# Altium PCB PCB1.PcbDoc (part 1 of 2)
Units mm, origin at the board's own origin, x right, y up, seen from the top; angles counter-clockwise.
Board outline 150 x 80 mm, 2 copper layers (Top Layer, Bottom Layer), stack 1.571 mm thick; 176 components, 104 nets, 518 pads, 47 vias.
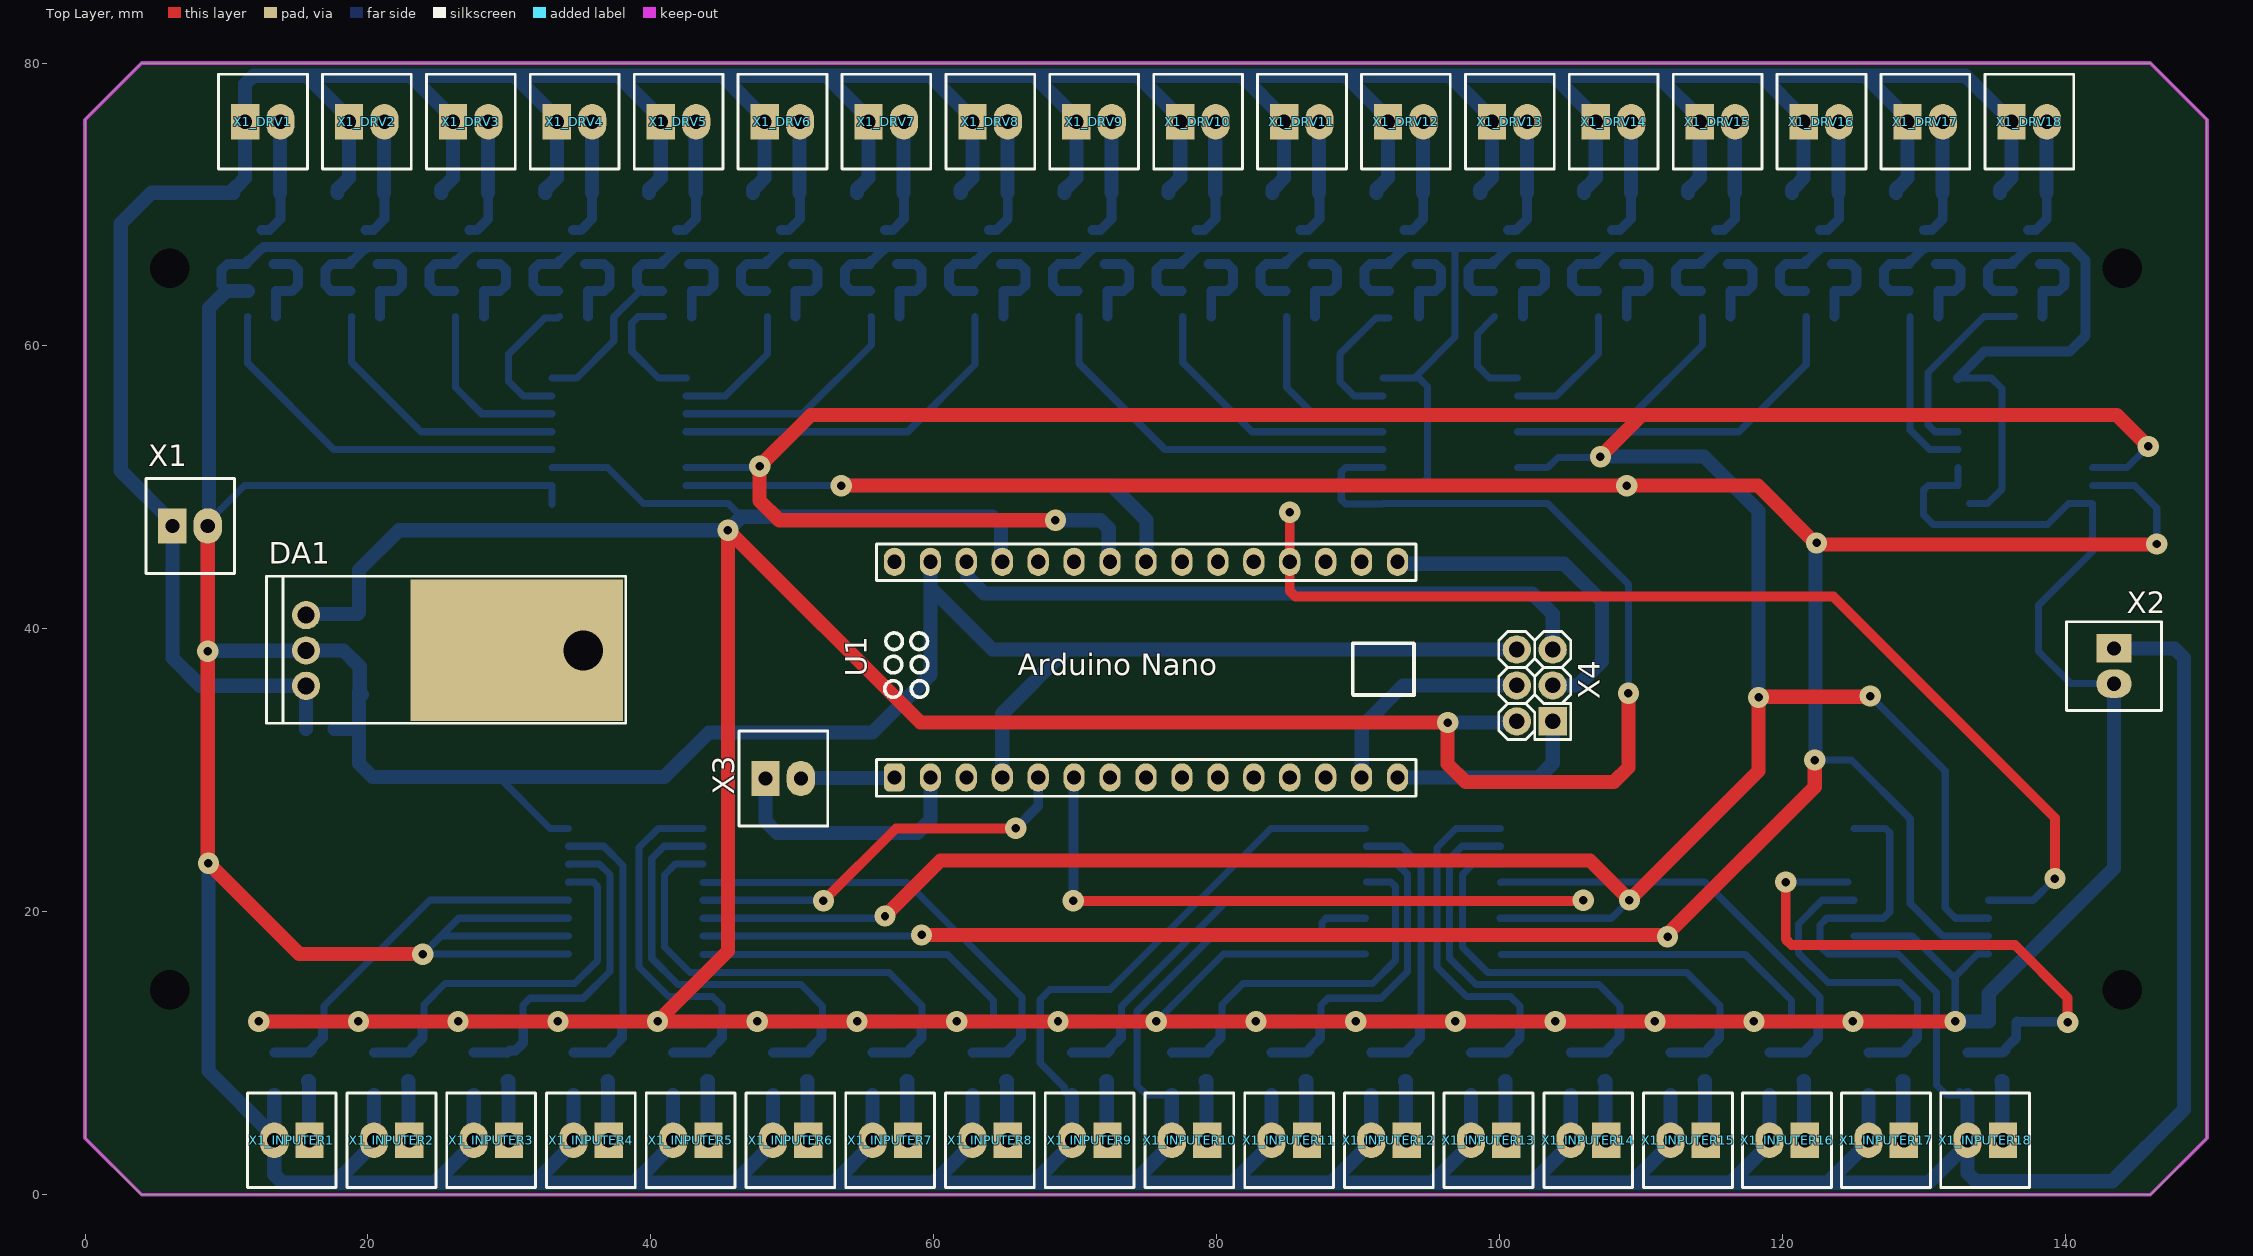
[diagram p0: Top Layer view]
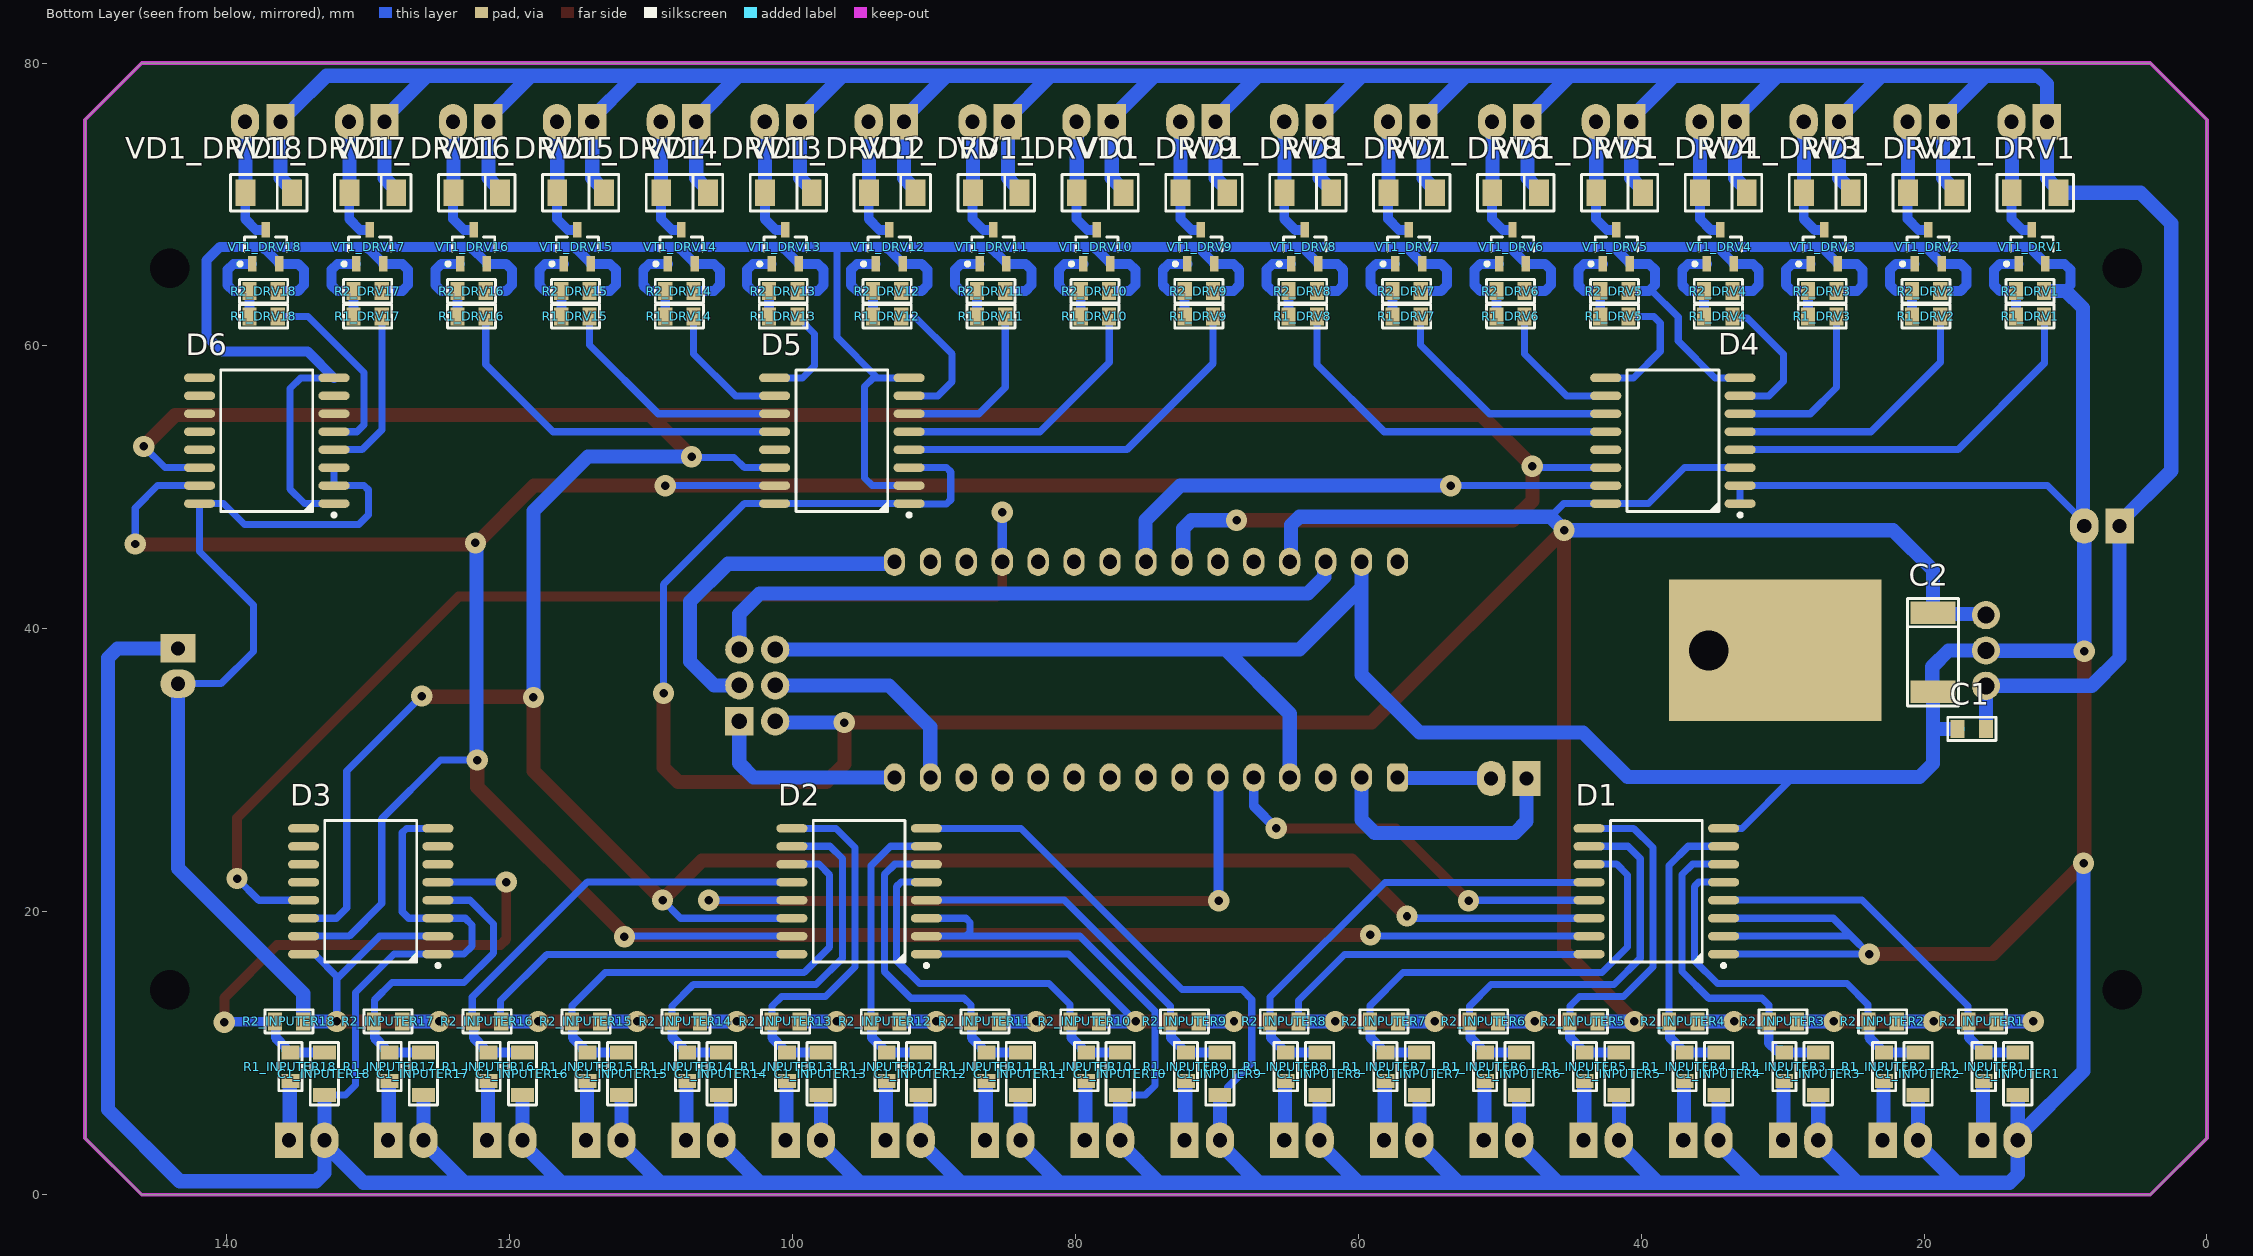
[diagram p1: Bottom Layer view, seen from below]

## Layer stack, top to bottom
Top Solder: solder mask 0.0102, Solder Resist, Dk 3.5
Top Layer: signal copper 0.0356
Dielectric 1: dielectric 1.5, FR-4, Dk 4.8
Bottom Layer: signal copper 0.0356
Bottom Solder: solder mask 0.0102, Solder Resist, Dk 3.5

## Board outline
4,0 0,4 0,76 4,80 146,80 150,76 150,4 146,0

## Design rules (kind name [scope] priority, off if disabled: settings)
Clearance [All] p1: gap=0.254 ignorepadtopadclearanceinfootprint=FALSE except(0: Arc-Hole Track-Hole SMDPad-Hole THPad-Hole Via-Hole Fill-Hole Poly-Hole Region-Hole Text-Hole)
PlaneConnect [All] p1: planeconnectstyle=Relief reliefexpansion=0.508 reliefentries=4 reliefconductorwidth=0.7 reliefairgap=0.254
PolygonConnect [All] p1: connectstyle=Relief reliefconductorwidth=0.7 reliefentries=4 polygonreliefangle="90 Angle" airgapwidth=0.254
RoomDefinition DRV9 [InComponentClass('DRV9')] p1: confinementstyle=ConfineIn formatcopy=TRUE lockcomponents=FALSE outline 74.876,60.85 74.876,79.8 67.626,79.8 67.626,60.85
RoomDefinition DRV1 [InComponentClass('DRV1')] p2: confinementstyle=ConfineIn formatcopy=TRUE lockcomponents=FALSE outline 16.12,60.85 16.12,79.8 8.87,79.8 8.87,60.85
RoomDefinition DRV4 [InComponentClass('DRV4')] p3: confinementstyle=ConfineIn formatcopy=TRUE lockcomponents=FALSE outline 38.154,60.85 38.154,79.8 30.904,79.8 30.904,60.85
RoomDefinition DRV3 [InComponentClass('DRV3')] p4: confinementstyle=ConfineIn formatcopy=TRUE lockcomponents=FALSE outline 30.809,60.85 30.809,79.8 23.559,79.8 23.559,60.85
RoomDefinition DRV2 [InComponentClass('DRV2')] p5: confinementstyle=ConfineIn formatcopy=TRUE lockcomponents=FALSE outline 23.465,60.85 23.465,79.8 16.215,79.8 16.215,60.85
RoomDefinition DRV8 [InComponentClass('DRV8')] p6: confinementstyle=ConfineIn formatcopy=TRUE lockcomponents=FALSE outline 67.531,60.85 67.531,79.8 60.281,79.8 60.281,60.85
RoomDefinition DRV7 [InComponentClass('DRV7')] p7: confinementstyle=ConfineIn formatcopy=TRUE lockcomponents=FALSE outline 60.187,60.85 60.187,79.8 52.937,79.8 52.937,60.85
RoomDefinition DRV6 [InComponentClass('DRV6')] p8: confinementstyle=ConfineIn formatcopy=TRUE lockcomponents=FALSE outline 52.842,60.85 52.842,79.8 45.592,79.8 45.592,60.85
RoomDefinition DRV12 [InComponentClass('DRV12')] p9: confinementstyle=ConfineIn formatcopy=TRUE lockcomponents=FALSE outline 96.909,60.85 96.909,79.8 89.659,79.8 89.659,60.85
RoomDefinition DRV11 [InComponentClass('DRV11')] p10: confinementstyle=ConfineIn formatcopy=TRUE lockcomponents=FALSE outline 89.564,60.85 89.564,79.8 82.314,79.8 82.314,60.85
RoomDefinition DRV10 [InComponentClass('DRV10')] p11: confinementstyle=ConfineIn formatcopy=TRUE lockcomponents=FALSE outline 82.22,60.85 82.22,79.8 74.97,79.8 74.97,60.85
RoomDefinition DRV17 [InComponentClass('DRV17')] p12: confinementstyle=ConfineIn formatcopy=TRUE lockcomponents=FALSE outline 133.631,60.85 133.631,79.8 126.381,79.8 126.381,60.85
RoomDefinition DRV16 [InComponentClass('DRV16')] p13: confinementstyle=ConfineIn formatcopy=TRUE lockcomponents=FALSE outline 126.286,60.85 126.286,79.8 119.036,79.8 119.036,60.85
RoomDefinition DRV15 [InComponentClass('DRV15')] p14: confinementstyle=ConfineIn formatcopy=TRUE lockcomponents=FALSE outline 118.942,60.85 118.942,79.8 111.692,79.8 111.692,60.85
RoomDefinition DRV14 [InComponentClass('DRV14')] p15: confinementstyle=ConfineIn formatcopy=TRUE lockcomponents=FALSE outline 111.598,60.85 111.598,79.8 104.348,79.8 104.348,60.85
RoomDefinition DRV13 [InComponentClass('DRV13')] p16: confinementstyle=ConfineIn formatcopy=TRUE lockcomponents=FALSE outline 104.253,60.85 104.253,79.8 97.003,79.8 97.003,60.85
RoomDefinition DRV5 [InComponentClass('DRV5')] p17: confinementstyle=ConfineIn formatcopy=TRUE lockcomponents=FALSE outline 45.498,60.85 45.498,79.8 38.248,79.8 38.248,60.85
RoomDefinition DRV18 [InComponentClass('DRV18')] p18: confinementstyle=ConfineIn formatcopy=TRUE lockcomponents=FALSE outline 140.984,60.85 140.984,79.8 133.734,79.8 133.734,60.85
RoomDefinition INPUTER1 [InComponentClass('INPUTER1')] p19: confinementstyle=ConfineIn formatcopy=TRUE lockcomponents=FALSE outline 11.175,-0.15 18.075,-0.15 18.075,13.35 11.175,13.35
RoomDefinition INPUTER16 [InComponentClass('INPUTER16')] p20: confinementstyle=ConfineIn formatcopy=TRUE lockcomponents=FALSE outline 116.875,-0.15 123.775,-0.15 123.775,13.35 116.875,13.35
RoomDefinition INPUTER18 [InComponentClass('INPUTER18')] p21: confinementstyle=ConfineIn formatcopy=TRUE lockcomponents=FALSE outline 130.875,-0.15 137.775,-0.15 137.775,13.35 130.875,13.35
RoomDefinition INPUTER17 [InComponentClass('INPUTER17')] p22: confinementstyle=ConfineIn formatcopy=TRUE lockcomponents=FALSE outline 123.875,-0.15 130.775,-0.15 130.775,13.35 123.875,13.35
RoomDefinition INPUTER2 [InComponentClass('INPUTER2')] p23: confinementstyle=ConfineIn formatcopy=TRUE lockcomponents=FALSE outline 18.225,-0.15 25.125,-0.15 25.125,13.35 18.225,13.35
RoomDefinition INPUTER15 [InComponentClass('INPUTER15')] p24: confinementstyle=ConfineIn formatcopy=TRUE lockcomponents=FALSE outline 109.875,-0.15 116.775,-0.15 116.775,13.35 109.875,13.35
RoomDefinition INPUTER14 [InComponentClass('INPUTER14')] p25: confinementstyle=ConfineIn formatcopy=TRUE lockcomponents=FALSE outline 102.825,-0.15 109.725,-0.15 109.725,13.35 102.825,13.35
RoomDefinition INPUTER13 [InComponentClass('INPUTER13')] p26: confinementstyle=ConfineIn formatcopy=TRUE lockcomponents=FALSE outline 95.775,-0.15 102.675,-0.15 102.675,13.35 95.775,13.35
RoomDefinition INPUTER12 [InComponentClass('INPUTER12')] p27: confinementstyle=ConfineIn formatcopy=TRUE lockcomponents=FALSE outline 88.725,-0.15 95.625,-0.15 95.625,13.35 88.725,13.35
RoomDefinition INPUTER11 [InComponentClass('INPUTER11')] p28: confinementstyle=ConfineIn formatcopy=TRUE lockcomponents=FALSE outline 81.675,-0.15 88.575,-0.15 88.575,13.35 81.675,13.35
RoomDefinition INPUTER10 [InComponentClass('INPUTER10')] p29: confinementstyle=ConfineIn formatcopy=TRUE lockcomponents=FALSE outline 74.625,-0.15 81.525,-0.15 81.525,13.35 74.625,13.35
RoomDefinition INPUTER9 [InComponentClass('INPUTER9')] p30: confinementstyle=ConfineIn formatcopy=TRUE lockcomponents=FALSE outline 67.575,-0.15 74.475,-0.15 74.475,13.35 67.575,13.35
RoomDefinition INPUTER8 [InComponentClass('INPUTER8')] p31: confinementstyle=ConfineIn formatcopy=TRUE lockcomponents=FALSE outline 60.525,-0.15 67.425,-0.15 67.425,13.35 60.525,13.35
RoomDefinition INPUTER7 [InComponentClass('INPUTER7')] p32: confinementstyle=ConfineIn formatcopy=TRUE lockcomponents=FALSE outline 53.475,-0.15 60.375,-0.15 60.375,13.35 53.475,13.35
RoomDefinition INPUTER6 [InComponentClass('INPUTER6')] p33: confinementstyle=ConfineIn formatcopy=TRUE lockcomponents=FALSE outline 46.425,-0.15 53.325,-0.15 53.325,13.35 46.425,13.35
RoomDefinition INPUTER5 [InComponentClass('INPUTER5')] p34: confinementstyle=ConfineIn formatcopy=TRUE lockcomponents=FALSE outline 39.375,-0.15 46.275,-0.15 46.275,13.35 39.375,13.35
RoomDefinition INPUTER4 [InComponentClass('INPUTER4')] p35: confinementstyle=ConfineIn formatcopy=TRUE lockcomponents=FALSE outline 32.325,-0.15 39.225,-0.15 39.225,13.35 32.325,13.35
RoomDefinition INPUTER3 [InComponentClass('INPUTER3')] p36: confinementstyle=ConfineIn formatcopy=TRUE lockcomponents=FALSE outline 25.275,-0.15 32.175,-0.15 32.175,13.35 25.275,13.35
RoomDefinition DA1 [InComponentClass('DA1')] p37: confinementstyle=ConfineIn formatcopy=TRUE lockcomponents=FALSE outline 11.525,31.775 39.8,31.775 39.8,45.875 11.525,45.875
RoutingVias [All] p1: holewidth=0.711 width=1.27 viastyle="Through Hole" minholewidth=0.711 minwidth=1.27 maxholewidth=0.711 maxwidth=1.27
SolderMaskExpansion [All] p1: expansion=0.102 istentingtop=FALSE
Width [All] p1: maxlimit=1 minlimit=0.3 preferedwidth=0.5 minimp=50.000000 maximp=50.000000 favimp=50.000000
29 further rules are at their usual default settings.

## Classes and differential pairs
component class INPUTER18: C1_INPUTER18 R1_INPUTER18 R2_INPUTER18 X1_INPUTER18
component class INPUTER17: C1_INPUTER17 R1_INPUTER17 R2_INPUTER17 X1_INPUTER17
component class INPUTER16: C1_INPUTER16 R1_INPUTER16 R2_INPUTER16 X1_INPUTER16
component class DRV18: R1_DRV18 R2_DRV18 VD1_DRV18 VT1_DRV18 X1_DRV18
component class DRV17: R1_DRV17 R2_DRV17 VD1_DRV17 VT1_DRV17 X1_DRV17
channel class input: INPUTER1 INPUTER2 INPUTER3 INPUTER4 INPUTER5 INPUTER6 INPUTER7 INPUTER8 INPUTER9 INPUTER10 INPUTER11 INPUTER12 INPUTER13 INPUTER14 INPUTER15 INPUTER16 INPUTER17 INPUTER18
net class OUT[1..18]: OUT1 OUT2 OUT3 OUT4 OUT5 OUT6 OUT7 OUT8 OUT9 OUT10 OUT11 OUT12 OUT13 OUT14 OUT15 OUT16 OUT17 OUT18
component class INPUTER15: C1_INPUTER15 R1_INPUTER15 R2_INPUTER15 X1_INPUTER15
component class INPUTER14: C1_INPUTER14 R1_INPUTER14 R2_INPUTER14 X1_INPUTER14
component class INPUTER13: C1_INPUTER13 R1_INPUTER13 R2_INPUTER13 X1_INPUTER13
component class INPUTER12: C1_INPUTER12 R1_INPUTER12 R2_INPUTER12 X1_INPUTER12
component class INPUTER11: C1_INPUTER11 R1_INPUTER11 R2_INPUTER11 X1_INPUTER11
component class INPUTER10: C1_INPUTER10 R1_INPUTER10 R2_INPUTER10 X1_INPUTER10
component class INPUTER9: C1_INPUTER9 R1_INPUTER9 R2_INPUTER9 X1_INPUTER9
component class INPUTER8: C1_INPUTER8 R1_INPUTER8 R2_INPUTER8 X1_INPUTER8
component class INPUTER7: C1_INPUTER7 R1_INPUTER7 R2_INPUTER7 X1_INPUTER7
component class INPUTER6: C1_INPUTER6 R1_INPUTER6 R2_INPUTER6 X1_INPUTER6
component class INPUTER5: C1_INPUTER5 R1_INPUTER5 R2_INPUTER5 X1_INPUTER5
component class INPUTER4: C1_INPUTER4 R1_INPUTER4 R2_INPUTER4 X1_INPUTER4
component class INPUTER3: C1_INPUTER3 R1_INPUTER3 R2_INPUTER3 X1_INPUTER3
component class INPUTER2: C1_INPUTER2 R1_INPUTER2 R2_INPUTER2 X1_INPUTER2
component class INPUTER1: C1_INPUTER1 R1_INPUTER1 R2_INPUTER1 X1_INPUTER1
component class DRV16: R1_DRV16 R2_DRV16 VD1_DRV16 VT1_DRV16 X1_DRV16
component class DRV15: R1_DRV15 R2_DRV15 VD1_DRV15 VT1_DRV15 X1_DRV15
component class DRV14: R1_DRV14 R2_DRV14 VD1_DRV14 VT1_DRV14 X1_DRV14
component class DRV13: R1_DRV13 R2_DRV13 VD1_DRV13 VT1_DRV13 X1_DRV13
component class DA1: C1 C2 DA1
channel class driver: DRV1 DRV2 DRV3 DRV4 DRV5 DRV6 DRV7 DRV8 DRV9 DRV10 DRV11 DRV12 DRV13 DRV14 DRV15 DRV16 DRV17 DRV18
net class IN[1..18]: IN1 IN2 IN3 IN4 IN5 IN6 IN7 IN8 IN9 IN10 IN11 IN12 IN13 IN14 IN15 IN16 IN17 IN18
component class Sheet1: D1 D2 D3 D4 D5 D6 U1 X1 X2 X3 X4
component class DRV12: R1_DRV12 R2_DRV12 VD1_DRV12 VT1_DRV12 X1_DRV12
component class DRV11: R1_DRV11 R2_DRV11 VD1_DRV11 VT1_DRV11 X1_DRV11
component class DRV10: R1_DRV10 R2_DRV10 VD1_DRV10 VT1_DRV10 X1_DRV10
component class DRV9: R1_DRV9 R2_DRV9 VD1_DRV9 VT1_DRV9 X1_DRV9
component class DRV8: R1_DRV8 R2_DRV8 VD1_DRV8 VT1_DRV8 X1_DRV8
component class DRV7: R1_DRV7 R2_DRV7 VD1_DRV7 VT1_DRV7 X1_DRV7
component class DRV6: R1_DRV6 R2_DRV6 VD1_DRV6 VT1_DRV6 X1_DRV6
component class DRV5: R1_DRV5 R2_DRV5 VD1_DRV5 VT1_DRV5 X1_DRV5
component class DRV4: R1_DRV4 R2_DRV4 VD1_DRV4 VT1_DRV4 X1_DRV4
component class DRV3: R1_DRV3 R2_DRV3 VD1_DRV3 VT1_DRV3 X1_DRV3
component class DRV2: R1_DRV2 R2_DRV2 VD1_DRV2 VT1_DRV2 X1_DRV2
component class DRV1: R1_DRV1 R2_DRV1 VD1_DRV1 VT1_DRV1 X1_DRV1

## Components (designator, comment, footprint, x,y, rotation, side; value= is the part's Value field where it differs from the comment)
C1 "0,1 мкФ, 50 В, 10 %" "CAP: 0805" 16.625,32.925 r180 bottom
C1_INPUTER1 "22 мкФ, 16В, 10%" "CAP: 1206" 13.375,8.55 r90 bottom (schematic designator C1)
C1_INPUTER2 "22 мкФ, 16В, 10%" "CAP: 1206" 20.425,8.55 r90 bottom (schematic designator C1)
C1_INPUTER3 "22 мкФ, 16В, 10%" "CAP: 1206" 27.475,8.55 r90 bottom (schematic designator C1)
C1_INPUTER4 "22 мкФ, 16В, 10%" "CAP: 1206" 34.525,8.55 r90 bottom (schematic designator C1)
C1_INPUTER5 "22 мкФ, 16В, 10%" "CAP: 1206" 41.575,8.55 r90 bottom (schematic designator C1)
C1_INPUTER6 "22 мкФ, 16В, 10%" "CAP: 1206" 48.625,8.55 r90 bottom (schematic designator C1)
C1_INPUTER7 "22 мкФ, 16В, 10%" "CAP: 1206" 55.675,8.55 r90 bottom (schematic designator C1)
C1_INPUTER8 "22 мкФ, 16В, 10%" "CAP: 1206" 62.725,8.55 r90 bottom (schematic designator C1)
C1_INPUTER9 "22 мкФ, 16В, 10%" "CAP: 1206" 69.775,8.55 r90 bottom (schematic designator C1)
C1_INPUTER10 "22 мкФ, 16В, 10%" "CAP: 1206" 76.825,8.55 r90 bottom (schematic designator C1)
C1_INPUTER11 "22 мкФ, 16В, 10%" "CAP: 1206" 83.875,8.55 r90 bottom (schematic designator C1)
C1_INPUTER12 "22 мкФ, 16В, 10%" "CAP: 1206" 90.925,8.55 r90 bottom (schematic designator C1)
C1_INPUTER13 "22 мкФ, 16В, 10%" "CAP: 1206" 97.975,8.55 r90 bottom (schematic designator C1)
C1_INPUTER14 "22 мкФ, 16В, 10%" "CAP: 1206" 105.025,8.55 r90 bottom (schematic designator C1)
C1_INPUTER15 "22 мкФ, 16В, 10%" "CAP: 1206" 112.075,8.55 r90 bottom (schematic designator C1)
C1_INPUTER16 "22 мкФ, 16В, 10%" "CAP: 1206" 119.075,8.55 r90 bottom (schematic designator C1)
C1_INPUTER17 "22 мкФ, 16В, 10%" "CAP: 1206" 126.075,8.55 r90 bottom (schematic designator C1)
C1_INPUTER18 "22 мкФ, 16В, 10%" "CAP: 1206" 133.075,8.55 r90 bottom (schematic designator C1)
C2 "22 мкФ, 10%, 16 В" "CAP: TANTAL-C" 19.375,38.35 r270 bottom
D1 "IC logic buffer, 2...6V, -40...+125°C, 20-TSSOP" 16-TSSOP 38.925,21.45 r0 bottom
D2 "IC logic buffer, 2...6V, -40...+125°C, 20-TSSOP" 16-TSSOP 95.275,21.45 r0 bottom
D3 "IC logic buffer, 2...6V, -40...+125°C, 20-TSSOP" 16-TSSOP 129.8,21.45 r0 bottom
D4 "IC logic buffer, 2...6V, -40...+125°C, 20-TSSOP" 16-TSSOP 37.75,53.3 r0 bottom
D5 "IC logic buffer, 2...6V, -40...+125°C, 20-TSSOP" 16-TSSOP 96.5,53.3 r0 bottom
D6 "IC logic buffer, 2...6V, -40...+125°C, 20-TSSOP" 16-TSSOP 137.15,53.3 r0 bottom
DA1 "L4940V5" TO220_L 15.625,38.475 r90 top
R1_DRV1 "100 Ом, 5%, 0,125 Вт" "RES: 0805" 12.51,62.084 r0 bottom value=100 (schematic designator R1)
R1_DRV2 "100 Ом, 5%, 0,125 Вт" "RES: 0805" 19.854,62.084 r0 bottom value=100 (schematic designator R1)
R1_DRV3 "100 Ом, 5%, 0,125 Вт" "RES: 0805" 27.199,62.084 r0 bottom value=100 (schematic designator R1)
R1_DRV4 "100 Ом, 5%, 0,125 Вт" "RES: 0805" 34.543,62.084 r0 bottom value=100 (schematic designator R1)
R1_DRV5 "100 Ом, 5%, 0,125 Вт" "RES: 0805" 41.888,62.084 r0 bottom value=100 (schematic designator R1)
R1_DRV6 "100 Ом, 5%, 0,125 Вт" "RES: 0805" 49.232,62.084 r0 bottom value=100 (schematic designator R1)
R1_DRV7 "100 Ом, 5%, 0,125 Вт" "RES: 0805" 56.576,62.084 r0 bottom value=100 (schematic designator R1)
R1_DRV8 "100 Ом, 5%, 0,125 Вт" "RES: 0805" 63.921,62.084 r0 bottom value=100 (schematic designator R1)
R1_DRV9 "100 Ом, 5%, 0,125 Вт" "RES: 0805" 71.265,62.084 r0 bottom value=100 (schematic designator R1)
R1_DRV10 "100 Ом, 5%, 0,125 Вт" "RES: 0805" 78.61,62.084 r0 bottom value=100 (schematic designator R1)
R1_DRV11 "100 Ом, 5%, 0,125 Вт" "RES: 0805" 85.954,62.084 r0 bottom value=100 (schematic designator R1)
R1_DRV12 "100 Ом, 5%, 0,125 Вт" "RES: 0805" 93.298,62.084 r0 bottom value=100 (schematic designator R1)
R1_DRV13 "100 Ом, 5%, 0,125 Вт" "RES: 0805" 100.643,62.084 r0 bottom value=100 (schematic designator R1)
R1_DRV14 "100 Ом, 5%, 0,125 Вт" "RES: 0805" 107.987,62.084 r0 bottom value=100 (schematic designator R1)
R1_DRV15 "100 Ом, 5%, 0,125 Вт" "RES: 0805" 115.332,62.084 r0 bottom value=100 (schematic designator R1)
R1_DRV16 "100 Ом, 5%, 0,125 Вт" "RES: 0805" 122.676,62.084 r0 bottom value=100 (schematic designator R1)
R1_DRV17 "100 Ом, 5%, 0,125 Вт" "RES: 0805" 130.02,62.084 r0 bottom value=100 (schematic designator R1)
R1_DRV18 "100 Ом, 5%, 0,125 Вт" "RES: 0805" 137.373,62.084 r0 bottom value=100 (schematic designator R1)
R1_INPUTER1 "330 Ом, 5%,  0.125Вт" "RES: 0805" 15.775,9.05 r90 bottom value=100 (schematic designator R1)
R1_INPUTER2 "330 Ом, 5%,  0.125Вт" "RES: 0805" 22.825,9.05 r90 bottom value=100 (schematic designator R1)
R1_INPUTER3 "330 Ом, 5%,  0.125Вт" "RES: 0805" 29.875,9.05 r90 bottom value=100 (schematic designator R1)
R1_INPUTER4 "330 Ом, 5%,  0.125Вт" "RES: 0805" 36.925,9.05 r90 bottom value=100 (schematic designator R1)
R1_INPUTER5 "330 Ом, 5%,  0.125Вт" "RES: 0805" 43.975,9.05 r90 bottom value=100 (schematic designator R1)
R1_INPUTER6 "330 Ом, 5%,  0.125Вт" "RES: 0805" 51.025,9.05 r90 bottom value=100 (schematic designator R1)
R1_INPUTER7 "330 Ом, 5%,  0.125Вт" "RES: 0805" 58.075,9.05 r90 bottom value=100 (schematic designator R1)
R1_INPUTER8 "330 Ом, 5%,  0.125Вт" "RES: 0805" 65.125,9.05 r90 bottom value=100 (schematic designator R1)
R1_INPUTER9 "330 Ом, 5%,  0.125Вт" "RES: 0805" 72.175,9.05 r90 bottom value=100 (schematic designator R1)
R1_INPUTER10 "330 Ом, 5%,  0.125Вт" "RES: 0805" 79.225,9.05 r90 bottom value=100 (schematic designator R1)
R1_INPUTER11 "330 Ом, 5%,  0.125Вт" "RES: 0805" 86.275,9.05 r90 bottom value=100 (schematic designator R1)
R1_INPUTER12 "330 Ом, 5%,  0.125Вт" "RES: 0805" 93.325,9.05 r90 bottom value=100 (schematic designator R1)
R1_INPUTER13 "330 Ом, 5%,  0.125Вт" "RES: 0805" 100.375,9.05 r90 bottom value=100 (schematic designator R1)
R1_INPUTER14 "330 Ом, 5%,  0.125Вт" "RES: 0805" 107.425,9.05 r90 bottom value=100 (schematic designator R1)
R1_INPUTER15 "330 Ом, 5%,  0.125Вт" "RES: 0805" 114.475,9.05 r90 bottom value=100 (schematic designator R1)
R1_INPUTER16 "330 Ом, 5%,  0.125Вт" "RES: 0805" 121.475,9.05 r90 bottom value=100 (schematic designator R1)
R1_INPUTER17 "330 Ом, 5%,  0.125Вт" "RES: 0805" 128.475,9.05 r90 bottom value=100 (schematic designator R1)
R1_INPUTER18 "330 Ом, 5%,  0.125Вт" "RES: 0805" 135.475,9.05 r90 bottom value=100 (schematic designator R1)
R2_DRV1 "10 кОм, 5%, 0,125 Вт" "RES: 0805" 12.51,63.882 r180 bottom value=100 (schematic designator R2)
R2_DRV2 "10 кОм, 5%, 0,125 Вт" "RES: 0805" 19.854,63.882 r180 bottom value=100 (schematic designator R2)
R2_DRV3 "10 кОм, 5%, 0,125 Вт" "RES: 0805" 27.199,63.882 r180 bottom value=100 (schematic designator R2)
R2_DRV4 "10 кОм, 5%, 0,125 Вт" "RES: 0805" 34.543,63.882 r180 bottom value=100 (schematic designator R2)
R2_DRV5 "10 кОм, 5%, 0,125 Вт" "RES: 0805" 41.888,63.882 r180 bottom value=100 (schematic designator R2)
R2_DRV6 "10 кОм, 5%, 0,125 Вт" "RES: 0805" 49.232,63.882 r180 bottom value=100 (schematic designator R2)
R2_DRV7 "10 кОм, 5%, 0,125 Вт" "RES: 0805" 56.576,63.882 r180 bottom value=100 (schematic designator R2)
R2_DRV8 "10 кОм, 5%, 0,125 Вт" "RES: 0805" 63.921,63.882 r180 bottom value=100 (schematic designator R2)
R2_DRV9 "10 кОм, 5%, 0,125 Вт" "RES: 0805" 71.265,63.882 r180 bottom value=100 (schematic designator R2)
R2_DRV10 "10 кОм, 5%, 0,125 Вт" "RES: 0805" 78.61,63.882 r180 bottom value=100 (schematic designator R2)
R2_DRV11 "10 кОм, 5%, 0,125 Вт" "RES: 0805" 85.954,63.882 r180 bottom value=100 (schematic designator R2)
R2_DRV12 "10 кОм, 5%, 0,125 Вт" "RES: 0805" 93.298,63.882 r180 bottom value=100 (schematic designator R2)
R2_DRV13 "10 кОм, 5%, 0,125 Вт" "RES: 0805" 100.643,63.882 r180 bottom value=100 (schematic designator R2)
R2_DRV14 "10 кОм, 5%, 0,125 Вт" "RES: 0805" 107.987,63.882 r180 bottom value=100 (schematic designator R2)
R2_DRV15 "10 кОм, 5%, 0,125 Вт" "RES: 0805" 115.332,63.882 r180 bottom value=100 (schematic designator R2)
R2_DRV16 "10 кОм, 5%, 0,125 Вт" "RES: 0805" 122.676,63.882 r180 bottom value=100 (schematic designator R2)
R2_DRV17 "10 кОм, 5%, 0,125 Вт" "RES: 0805" 130.02,63.882 r180 bottom value=100 (schematic designator R2)
R2_DRV18 "10 кОм, 5%, 0,125 Вт" "RES: 0805" 137.373,63.882 r180 bottom value=100 (schematic designator R2)
R2_INPUTER1 "4,7 кОм, 5%,  0.125Вт" "RES: 0805" 15.875,12.25 r180 bottom value=100 (schematic designator R2)
R2_INPUTER2 "4,7 кОм, 5%,  0.125Вт" "RES: 0805" 22.925,12.25 r180 bottom value=100 (schematic designator R2)
R2_INPUTER3 "4,7 кОм, 5%,  0.125Вт" "RES: 0805" 29.975,12.25 r180 bottom value=100 (schematic designator R2)
R2_INPUTER4 "4,7 кОм, 5%,  0.125Вт" "RES: 0805" 37.025,12.25 r180 bottom value=100 (schematic designator R2)
R2_INPUTER5 "4,7 кОм, 5%,  0.125Вт" "RES: 0805" 44.075,12.25 r180 bottom value=100 (schematic designator R2)
R2_INPUTER6 "4,7 кОм, 5%,  0.125Вт" "RES: 0805" 51.125,12.25 r180 bottom value=100 (schematic designator R2)
R2_INPUTER7 "4,7 кОм, 5%,  0.125Вт" "RES: 0805" 58.175,12.25 r180 bottom value=100 (schematic designator R2)
R2_INPUTER8 "4,7 кОм, 5%,  0.125Вт" "RES: 0805" 65.225,12.25 r180 bottom value=100 (schematic designator R2)
R2_INPUTER9 "4,7 кОм, 5%,  0.125Вт" "RES: 0805" 72.275,12.25 r180 bottom value=100 (schematic designator R2)
R2_INPUTER10 "4,7 кОм, 5%,  0.125Вт" "RES: 0805" 79.325,12.25 r180 bottom value=100 (schematic designator R2)
R2_INPUTER11 "4,7 кОм, 5%,  0.125Вт" "RES: 0805" 86.375,12.25 r180 bottom value=100 (schematic designator R2)
R2_INPUTER12 "4,7 кОм, 5%,  0.125Вт" "RES: 0805" 93.425,12.25 r180 bottom value=100 (schematic designator R2)
R2_INPUTER13 "4,7 кОм, 5%,  0.125Вт" "RES: 0805" 100.475,12.25 r180 bottom value=100 (schematic designator R2)
R2_INPUTER14 "4,7 кОм, 5%,  0.125Вт" "RES: 0805" 107.525,12.25 r180 bottom value=100 (schematic designator R2)
R2_INPUTER15 "4,7 кОм, 5%,  0.125Вт" "RES: 0805" 114.575,12.25 r180 bottom value=100 (schematic designator R2)
R2_INPUTER16 "4,7 кОм, 5%,  0.125Вт" "RES: 0805" 121.575,12.25 r180 bottom value=100 (schematic designator R2)
R2_INPUTER17 "4,7 кОм, 5%,  0.125Вт" "RES: 0805" 128.575,12.25 r180 bottom value=100 (schematic designator R2)
R2_INPUTER18 "4,7 кОм, 5%,  0.125Вт" "RES: 0805" 135.575,12.25 r180 bottom value=100 (schematic designator R2)
U1 "Arduino Nano" "CON: ArduinoNano" 57.22,29.5 r0 top locked
VD1_DRV1 "Single diode, 75V, 150mA, 1V, 4ns, SOD-123FL, -55...+150°C" "DIODE: SOD123FL" 12.145,70.829 r180 bottom (schematic designator VD1)
VD1_DRV2 "Single diode, 75V, 150mA, 1V, 4ns, SOD-123FL, -55...+150°C" "DIODE: SOD123FL" 19.49,70.829 r180 bottom (schematic designator VD1)
VD1_DRV3 "Single diode, 75V, 150mA, 1V, 4ns, SOD-123FL, -55...+150°C" "DIODE: SOD123FL" 26.834,70.829 r180 bottom (schematic designator VD1)
VD1_DRV4 "Single diode, 75V, 150mA, 1V, 4ns, SOD-123FL, -55...+150°C" "DIODE: SOD123FL" 34.179,70.829 r180 bottom (schematic designator VD1)
VD1_DRV5 "Single diode, 75V, 150mA, 1V, 4ns, SOD-123FL, -55...+150°C" "DIODE: SOD123FL" 41.523,70.829 r180 bottom (schematic designator VD1)
VD1_DRV6 "Single diode, 75V, 150mA, 1V, 4ns, SOD-123FL, -55...+150°C" "DIODE: SOD123FL" 48.867,70.829 r180 bottom (schematic designator VD1)
VD1_DRV7 "Single diode, 75V, 150mA, 1V, 4ns, SOD-123FL, -55...+150°C" "DIODE: SOD123FL" 56.212,70.829 r180 bottom (schematic designator VD1)
VD1_DRV8 "Single diode, 75V, 150mA, 1V, 4ns, SOD-123FL, -55...+150°C" "DIODE: SOD123FL" 63.556,70.829 r180 bottom (schematic designator VD1)
VD1_DRV9 "Single diode, 75V, 150mA, 1V, 4ns, SOD-123FL, -55...+150°C" "DIODE: SOD123FL" 70.901,70.829 r180 bottom (schematic designator VD1)
VD1_DRV10 "Single diode, 75V, 150mA, 1V, 4ns, SOD-123FL, -55...+150°C" "DIODE: SOD123FL" 78.245,70.829 r180 bottom (schematic designator VD1)
VD1_DRV11 "Single diode, 75V, 150mA, 1V, 4ns, SOD-123FL, -55...+150°C" "DIODE: SOD123FL" 85.589,70.829 r180 bottom (schematic designator VD1)
VD1_DRV12 "Single diode, 75V, 150mA, 1V, 4ns, SOD-123FL, -55...+150°C" "DIODE: SOD123FL" 92.934,70.829 r180 bottom (schematic designator VD1)
VD1_DRV13 "Single diode, 75V, 150mA, 1V, 4ns, SOD-123FL, -55...+150°C" "DIODE: SOD123FL" 100.278,70.829 r180 bottom (schematic designator VD1)
VD1_DRV14 "Single diode, 75V, 150mA, 1V, 4ns, SOD-123FL, -55...+150°C" "DIODE: SOD123FL" 107.623,70.829 r180 bottom (schematic designator VD1)
VD1_DRV15 "Single diode, 75V, 150mA, 1V, 4ns, SOD-123FL, -55...+150°C" "DIODE: SOD123FL" 114.967,70.829 r180 bottom (schematic designator VD1)
VD1_DRV16 "Single diode, 75V, 150mA, 1V, 4ns, SOD-123FL, -55...+150°C" "DIODE: SOD123FL" 122.311,70.829 r180 bottom (schematic designator VD1)
VD1_DRV17 "Single diode, 75V, 150mA, 1V, 4ns, SOD-123FL, -55...+150°C" "DIODE: SOD123FL" 129.656,70.829 r180 bottom (schematic designator VD1)
VD1_DRV18 "Single diode, 75V, 150mA, 1V, 4ns, SOD-123FL, -55...+150°C" "DIODE: SOD123FL" 137.009,70.829 r180 bottom (schematic designator VD1)
VT1_DRV1 "MOSFET N-channel transistor, 80V, 7A, 9.1nC, 2.5W, 34mOhm, 756pF, 8-TDSON, -55...+150°C" SOT23 12.37,67 r90 bottom (schematic designator VT1)
VT1_DRV2 "MOSFET N-channel transistor, 80V, 7A, 9.1nC, 2.5W, 34mOhm, 756pF, 8-TDSON, -55...+150°C" SOT23 19.715,67 r90 bottom (schematic designator VT1)
VT1_DRV3 "MOSFET N-channel transistor, 80V, 7A, 9.1nC, 2.5W, 34mOhm, 756pF, 8-TDSON, -55...+150°C" SOT23 27.059,67 r90 bottom (schematic designator VT1)
VT1_DRV4 "MOSFET N-channel transistor, 80V, 7A, 9.1nC, 2.5W, 34mOhm, 756pF, 8-TDSON, -55...+150°C" SOT23 34.404,67 r90 bottom (schematic designator VT1)
VT1_DRV5 "MOSFET N-channel transistor, 80V, 7A, 9.1nC, 2.5W, 34mOhm, 756pF, 8-TDSON, -55...+150°C" SOT23 41.748,67 r90 bottom (schematic designator VT1)
VT1_DRV6 "MOSFET N-channel transistor, 80V, 7A, 9.1nC, 2.5W, 34mOhm, 756pF, 8-TDSON, -55...+150°C" SOT23 49.092,67 r90 bottom (schematic designator VT1)
VT1_DRV7 "MOSFET N-channel transistor, 80V, 7A, 9.1nC, 2.5W, 34mOhm, 756pF, 8-TDSON, -55...+150°C" SOT23 56.437,67 r90 bottom (schematic designator VT1)
VT1_DRV8 "MOSFET N-channel transistor, 80V, 7A, 9.1nC, 2.5W, 34mOhm, 756pF, 8-TDSON, -55...+150°C" SOT23 63.781,67 r90 bottom (schematic designator VT1)
VT1_DRV9 "MOSFET N-channel transistor, 80V, 7A, 9.1nC, 2.5W, 34mOhm, 756pF, 8-TDSON, -55...+150°C" SOT23 71.126,67 r90 bottom (schematic designator VT1)
VT1_DRV10 "MOSFET N-channel transistor, 80V, 7A, 9.1nC, 2.5W, 34mOhm, 756pF, 8-TDSON, -55...+150°C" SOT23 78.47,67 r90 bottom (schematic designator VT1)
VT1_DRV11 "MOSFET N-channel transistor, 80V, 7A, 9.1nC, 2.5W, 34mOhm, 756pF, 8-TDSON, -55...+150°C" SOT23 85.814,67 r90 bottom (schematic designator VT1)
VT1_DRV12 "MOSFET N-channel transistor, 80V, 7A, 9.1nC, 2.5W, 34mOhm, 756pF, 8-TDSON, -55...+150°C" SOT23 93.159,67 r90 bottom (schematic designator VT1)
VT1_DRV13 "MOSFET N-channel transistor, 80V, 7A, 9.1nC, 2.5W, 34mOhm, 756pF, 8-TDSON, -55...+150°C" SOT23 100.503,67 r90 bottom (schematic designator VT1)
VT1_DRV14 "MOSFET N-channel transistor, 80V, 7A, 9.1nC, 2.5W, 34mOhm, 756pF, 8-TDSON, -55...+150°C" SOT23 107.848,67 r90 bottom (schematic designator VT1)
VT1_DRV15 "MOSFET N-channel transistor, 80V, 7A, 9.1nC, 2.5W, 34mOhm, 756pF, 8-TDSON, -55...+150°C" SOT23 115.192,67 r90 bottom (schematic designator VT1)
VT1_DRV16 "MOSFET N-channel transistor, 80V, 7A, 9.1nC, 2.5W, 34mOhm, 756pF, 8-TDSON, -55...+150°C" SOT23 122.536,67 r90 bottom (schematic designator VT1)
VT1_DRV17 "MOSFET N-channel transistor, 80V, 7A, 9.1nC, 2.5W, 34mOhm, 756pF, 8-TDSON, -55...+150°C" SOT23 129.881,67 r90 bottom (schematic designator VT1)
VT1_DRV18 "MOSFET N-channel transistor, 80V, 7A, 9.1nC, 2.5W, 34mOhm, 756pF, 8-TDSON, -55...+150°C" SOT23 137.234,67 r90 bottom (schematic designator VT1)
X1 "Terminal connector, 2pin, 3.5mm, 300VAC, 10A" TB_2_2.5MM 6.175,47.275 r0 top
X1_DRV1 "Terminal connector, 2pin, 3.5mm, 300VAC, 10A" TB_2_2.5MM 11.32,75.85 r0 top (schematic designator X1)
X1_DRV2 "Terminal connector, 2pin, 3.5mm, 300VAC, 10A" TB_2_2.5MM 18.665,75.85 r0 top (schematic designator X1)
X1_DRV3 "Terminal connector, 2pin, 3.5mm, 300VAC, 10A" TB_2_2.5MM 26.009,75.85 r0 top (schematic designator X1)
X1_DRV4 "Terminal connector, 2pin, 3.5mm, 300VAC, 10A" TB_2_2.5MM 33.354,75.85 r0 top (schematic designator X1)
X1_DRV5 "Terminal connector, 2pin, 3.5mm, 300VAC, 10A" TB_2_2.5MM 40.698,75.85 r0 top (schematic designator X1)
X1_DRV6 "Terminal connector, 2pin, 3.5mm, 300VAC, 10A" TB_2_2.5MM 48.042,75.85 r0 top (schematic designator X1)
X1_DRV7 "Terminal connector, 2pin, 3.5mm, 300VAC, 10A" TB_2_2.5MM 55.387,75.85 r0 top (schematic designator X1)
X1_DRV8 "Terminal connector, 2pin, 3.5mm, 300VAC, 10A" TB_2_2.5MM 62.731,75.85 r0 top (schematic designator X1)
X1_DRV9 "Terminal connector, 2pin, 3.5mm, 300VAC, 10A" TB_2_2.5MM 70.076,75.85 r0 top (schematic designator X1)
X1_DRV10 "Terminal connector, 2pin, 3.5mm, 300VAC, 10A" TB_2_2.5MM 77.42,75.85 r0 top (schematic designator X1)
X1_DRV11 "Terminal connector, 2pin, 3.5mm, 300VAC, 10A" TB_2_2.5MM 84.764,75.85 r0 top (schematic designator X1)
X1_DRV12 "Terminal connector, 2pin, 3.5mm, 300VAC, 10A" TB_2_2.5MM 92.109,75.85 r0 top (schematic designator X1)
X1_DRV13 "Terminal connector, 2pin, 3.5mm, 300VAC, 10A" TB_2_2.5MM 99.453,75.85 r0 top (schematic designator X1)
X1_DRV14 "Terminal connector, 2pin, 3.5mm, 300VAC, 10A" TB_2_2.5MM 106.798,75.85 r0 top (schematic designator X1)
X1_DRV15 "Terminal connector, 2pin, 3.5mm, 300VAC, 10A" TB_2_2.5MM 114.142,75.85 r0 top (schematic designator X1)
X1_DRV16 "Terminal connector, 2pin, 3.5mm, 300VAC, 10A" TB_2_2.5MM 121.486,75.85 r0 top (schematic designator X1)
X1_DRV17 "Terminal connector, 2pin, 3.5mm, 300VAC, 10A" TB_2_2.5MM 128.831,75.85 r0 top (schematic designator X1)
X1_DRV18 "Terminal connector, 2pin, 3.5mm, 300VAC, 10A" TB_2_2.5MM 136.184,75.85 r0 top (schematic designator X1)
X1_INPUTER1 "Terminal connector, 2pin, 3.5mm, 300VAC, 10A" TB_2_2.5MM 15.875,3.85 r180 top (schematic designator X1)
X1_INPUTER2 "Terminal connector, 2pin, 3.5mm, 300VAC, 10A" TB_2_2.5MM 22.925,3.85 r180 top (schematic designator X1)
X1_INPUTER3 "Terminal connector, 2pin, 3.5mm, 300VAC, 10A" TB_2_2.5MM 29.975,3.85 r180 top (schematic designator X1)
X1_INPUTER4 "Terminal connector, 2pin, 3.5mm, 300VAC, 10A" TB_2_2.5MM 37.025,3.85 r180 top (schematic designator X1)
X1_INPUTER5 "Terminal connector, 2pin, 3.5mm, 300VAC, 10A" TB_2_2.5MM 44.075,3.85 r180 top (schematic designator X1)
X1_INPUTER6 "Terminal connector, 2pin, 3.5mm, 300VAC, 10A" TB_2_2.5MM 51.125,3.85 r180 top (schematic designator X1)
X1_INPUTER7 "Terminal connector, 2pin, 3.5mm, 300VAC, 10A" TB_2_2.5MM 58.175,3.85 r180 top (schematic designator X1)
X1_INPUTER8 "Terminal connector, 2pin, 3.5mm, 300VAC, 10A" TB_2_2.5MM 65.225,3.85 r180 top (schematic designator X1)
X1_INPUTER9 "Terminal connector, 2pin, 3.5mm, 300VAC, 10A" TB_2_2.5MM 72.275,3.85 r180 top (schematic designator X1)
X1_INPUTER10 "Terminal connector, 2pin, 3.5mm, 300VAC, 10A" TB_2_2.5MM 79.325,3.85 r180 top (schematic designator X1)
X1_INPUTER11 "Terminal connector, 2pin, 3.5mm, 300VAC, 10A" TB_2_2.5MM 86.375,3.85 r180 top (schematic designator X1)
X1_INPUTER12 "Terminal connector, 2pin, 3.5mm, 300VAC, 10A" TB_2_2.5MM 93.425,3.85 r180 top (schematic designator X1)
X1_INPUTER13 "Terminal connector, 2pin, 3.5mm, 300VAC, 10A" TB_2_2.5MM 100.475,3.85 r180 top (schematic designator X1)
X1_INPUTER14 "Terminal connector, 2pin, 3.5mm, 300VAC, 10A" TB_2_2.5MM 107.525,3.85 r180 top (schematic designator X1)
X1_INPUTER15 "Terminal connector, 2pin, 3.5mm, 300VAC, 10A" TB_2_2.5MM 114.575,3.85 r180 top (schematic designator X1)
X1_INPUTER16 "Terminal connector, 2pin, 3.5mm, 300VAC, 10A" TB_2_2.5MM 121.575,3.85 r180 top (schematic designator X1)
X1_INPUTER17 "Terminal connector, 2pin, 3.5mm, 300VAC, 10A" TB_2_2.5MM 128.575,3.85 r180 top (schematic designator X1)
X1_INPUTER18 "Terminal connector, 2pin, 3.5mm, 300VAC, 10A" TB_2_2.5MM 135.575,3.85 r180 top (schematic designator X1)
X2 "Terminal connector, 2pin, 3.5mm, 300VAC, 10A" TB_2_2.5MM 143.425,38.625 r270 top
X3 "Terminal connector, 2pin, 3.5mm, 300VAC, 10A" TB_2_2.5MM 48.1,29.425 r0 top
X4 "Connector, 6pin, 2.54mm, 500VAC, 3A" "CON: PLD-6" 102.48,36 r90 top

## Footprints (in the part's own frame and the unit in brackets; to place one, negate y for a bottom-side part, rotate by r counter-clockwise, add the part's x,y. Pads: shape width x height; smd on the part's side, far side on the other; paste and mask are expansions set on the pad)
16-TSSOP [mm] "pitch 1.27 mm"
  oval 2.2x0.6 smd: 1(-4.75,4.445) 2(-4.75,3.175) 3(-4.75,1.905) 4(-4.75,0.635) 5(-4.75,-0.635) 6(-4.75,-1.905) 7(-4.75,-3.175) 8(-4.75,-4.445) 9(4.75,-4.445) 10(4.75,-3.175) 11(4.75,-1.905) 12(4.75,-0.635) 13(4.75,0.635) 14(4.75,1.905) 15(4.75,3.175) 16(4.75,4.445)
  round 0.7 on Mech1: 31(-4.7,4.6)
  silkscreen extent -4.87,-5 3.25,5.37, body extent -5.31,-5.25 5.32,5.25, height 2.62
"CAP: 0805" [mm]
  rect 1x1.25 smd: 1(-1,0) 2(1,0)
  silkscreen extent -1.7,-0.82 1.7,0.82, body extent -1,-0.62 1,0.63, height 0.78
"CAP: 1206" [mm]
  rect 1x1.6 smd: 1(-1.5,0) 2(1.5,0)
  silkscreen extent -2.2,-1 2.2,1, body extent -1.6,-0.8 1.6,0.8, height 1
"CAP: TANTAL-C" [mm]
  rect 1.6x3.2 smd: 1(-2.8,0) 2(2.8,0)
  silkscreen extent -3.8,-1.8 3.8,1.8, body extent -3.05,-1.67 3.05,1.68, height 2.7
"CON: ArduinoNano" [mm] "Connector; Header; 15x1 Position"
  rrect50% 1.5x2 hole 1: 1(0,0)
  oval 1.5x2 hole 1: 2(2.54,0) 3(5.08,0) 4(7.62,0) 5(10.16,0) 6(12.7,0) 7(15.24,0) 8(17.78,0) 9(20.32,0) 10(22.86,0) 11(25.4,0) 12(27.94,0) 13(30.48,0) 14(33.02,0) 15(35.56,0) 16(35.56,15.24) 17(33.02,15.24) 18(30.48,15.24) 19(27.94,15.24) 20(25.4,15.24) 21(22.86,15.24) 22(20.32,15.24) 23(17.78,15.24) 24(15.24,15.24) 25(12.7,15.24) 26(10.16,15.24) 27(7.62,15.24) 28(5.08,15.24) 29(2.54,15.24) 30(0,15.24)
  silkscreen extent -1.27,-1.33 36.88,16.51, body extent -1.23,-1.27 36.87,16.51, height 8.5
"CON: PLD-6" [mm]
  rect 2x2 hole 1.1: 1(-2.54,-1.27)
  round 2 hole 1.1: 2(-2.54,1.27) 3(0,-1.27) 4(0,1.27) 5(2.54,-1.27) 6(2.54,1.27)
  silkscreen extent -3.81,-2.54 3.81,2.54, body extent -3.81,-2.54 3.81,2.54, height 8.54
"DIODE: SOD123FL" [mm]
  rect 1.4x1.9 smd: 1(-1.65,0) 2(1.65,0)
  silkscreen extent -2.7,-1.3 2.7,1.3, body extent -1.87,-0.85 1.88,0.85, height 1.23
"RES: 0805" [mm]
  rect 1x1.25 smd: 1(-1,0) 2(1,0)
  silkscreen extent -1.7,-0.82 1.7,0.82, body extent -1,-0.6 1,0.6, height 0.44
SOT23 [mm]
  rect 1.1x0.6 smd: 1(-1.2,0.95) 2(-1.2,-0.95) 3(1.2,0)
  round 0.5 on Mech1: ""(-0.9,1.1)
  silkscreen extent -1.32,-1.5 0.7,1.92, body extent -1.32,-1.52 1.32,1.52, height 1.12
TB_2_2.5MM [mm]
  rect 2x2.5 hole 1: 1(0,0)
  oval 2x2.5 hole 1: 2(2.5,0)
  silkscreen extent -1.88,-3.35 4.4,3.35, body extent -1.48,-3.15 4.08,3.15, height 8.55
TO220_L [mm]
  round 2 hole 1.2: 1(-2.5,0) 2(0,0) 3(2.5,0)
  rect 10x15 smd far side: 4(0,-14.9)
  rect 10x15 smd: 4(0,-14.9)
  round 0 hole 2.8: ""(0,-19.6)
  silkscreen extent -5.15,-22.6 5.25,2.8, body extent -5.1,-22.42 5.1,0.22, height 4.5

## Part data
C1: library part GRM21BR71H104K, "Конденсатор", Manufacturer="Murata Manufacturing", Temperature Max=+125, Temperature Min=-55, ValueOther=Value, ChipDip=#https://www.chipdip.ru/product/grm21br71h104k#, ElementName="Кер.ЧИП конд. 0.1 мкФ X7R 50В 10% 0805, GRM21BR71H104K**", HelpURL=https://static.chipdip.ru/lib/235/DOC000235066.pdf, ID=19, last_update=21.11.2020, Partnumber=GRM21BR71H104K, Price=7*10, ValueSCH="0,1 мкФ, 50 В, 10 %", weight=0,04
C1_INPUTER1 C1_INPUTER2 C1_INPUTER3 C1_INPUTER4 C1_INPUTER5 C1_INPUTER6 C1_INPUTER7 C1_INPUTER8 C1_INPUTER9 C1_INPUTER10 C1_INPUTER11 C1_INPUTER12 C1_INPUTER13 C1_INPUTER14 C1_INPUTER15 C1_INPUTER16 C1_INPUTER17 C1_INPUTER18: library part GRM31CR61C226KE15L, "Конденсатор", Manufacturer="Murata Manufacturing", ValueOther=Value, ChipDip=#https://www.chipdip.ru/product/grm31cr61c226ke15l#, ElementName="Кер.ЧИП конд. 22 мкФ X5R 10% 16В 1206, GRM31CR61C226KE15L*", ID=29, last_update=15.04.2021, Partnumber=GRM31CR61C226KE15L, Price=26*10, ValueSCH="22 мкФ, 16В, 10%"
C2: library part TECAP22/16VC10, "Конденсатор", Manufacturer=Китай, Temperature Max=+125, Temperature Min=-55, ChipDip=#https://www.chipdip.ru/product/tecap-22-mkf-16-v-tip-c-10#, ElementName="Конденсатор танталовый SMD, TECAP, 22 мкФ, 16 В, тип C, 10%", ID=35, last_update=12.10.2023, Partnumber=TECAP22/16VC10, Price=44, ValueSCH="22 мкФ, 10%, 16 В", weight=0,15
D1 D2 D3 D4 D5 D6: library part PCF8574T/3,518, "Расширитель цифровых входов/выходов для шины I2C", Manufacturer="NXP Semiconductor", Package=20-TSSOP, Temperature=-40...+125°C, Temperature Max=+85, Temperature Min=-40, ComponentType="IC logic buffer", ElementName="PCF8574T/3,518. 8-битный расширитель портов", HelpURL=https://www.digikey.com/product-detail/en/nexperia-usa-inc/74HC245PW118/1727-4296-1-ND/2209913, ID=10, Partnumber=PCF8574T/3,518, Supply=2...6V, URL_bying=#https://www.chipdip.ru/product/pcf8574t-3.518?ysclid=luk07hbopc633637602#, ValueManufacturerPartNumber="IC logic buffer, 2...6V, -40...+125°C, 20-TSSOP", ValueSCH=PCF8574T/3,518
DA1: library part L4940V5_L, "LDO регуляторы напряжения 5.0V 1.5A Positive", Manufacturer=STMicroelectronics, Temperature Max=+150, Temperature Min=-40, ChipDip=#https://www.chipdip.ru/product/l4940v5#, ElementName="Линейный стабилизатор напряжения, +5В, 1.5 А, LDO", ID=8, last_update=12.10.2023, Partnumber=L4940V5_L, Price=200, URL_bying=#https://www.chipdip.ru/product/l4940v5#, ValueSCH=L4940V5, weight=2,5
R1_DRV1 R1_DRV2 R1_DRV3 R1_DRV4 R1_DRV5 R1_DRV6 R1_DRV7 R1_DRV8 R1_DRV9 R1_DRV10 R1_DRV11 R1_DRV12 R1_DRV13 R1_DRV14 R1_DRV15 R1_DRV16 R1_DRV17 R1_DRV18: library part RC0805JR-07100RL, "Бескорпусные толстопленочные резисторы (чип-резисторы, smd-резисторы) предназначены для работы в цепях постоянного, переменного и импульсного тока. Используются для поверхностного монтажа.", Manufacturer=Тайвань, MaxVoltage="150 В", Package=0805, Power=0,25, ChipDip=#https://www.chipdip.ru/product0/481795709#, ElementName="0.125Вт 0805 100 Ом, 5%, Чип резистор (SMD)", ID=35, last_update=20.11.2020, Partnumber=RC0805JR-07100RL, Price=2*20, ValueSCH="100 Ом, 5%, 0,125 Вт"
R1_INPUTER1 R1_INPUTER2 R1_INPUTER3 R1_INPUTER4 R1_INPUTER5 R1_INPUTER6 R1_INPUTER7 R1_INPUTER8 R1_INPUTER9 R1_INPUTER10 R1_INPUTER11 R1_INPUTER12 R1_INPUTER13 R1_INPUTER14 R1_INPUTER15 R1_INPUTER16 R1_INPUTER17 R1_INPUTER18: library part RC0805JR-07330RL, "Бескорпусные толстопленочные резисторы", Manufacturer=Тайвань, MaxVoltage="150 В", Package=0805, Power=0,25, ChipDip=#https://www.chipdip.ru/product/0.125w-0805-330-om-5#, ElementName="Чип резистор (SMD), 330 Ом, 5%, 0.125Вт 0805", ID=41, last_update=12.10.2023, Partnumber=RC0805JR-07330RL, Price=6*20, ValueSCH="330 Ом, 5%,  0.125Вт"
R2_DRV1 R2_DRV2 R2_DRV3 R2_DRV4 R2_DRV5 R2_DRV6 R2_DRV7 R2_DRV8 R2_DRV9 R2_DRV10 R2_DRV11 R2_DRV12 R2_DRV13 R2_DRV14 R2_DRV15 R2_DRV16 R2_DRV17 R2_DRV18: library part RC0805JR-0710KL, "Бескорпусные толстопленочные резисторы (чип-резисторы, smd-резисторы) предназначены для работы в цепях постоянного, переменного и импульсного тока. Используются для поверхностного монтажа.", Manufacturer=Тайвань, MaxVoltage="150 В", Package=0805, Power=0,25, ChipDip=#https://www.chipdip.ru/product0/528580584#, ElementName="0.125Вт 0805 10 кОм, 5%, Чип резистор (SMD)", ID=32, last_update=20.11.2020, Partnumber=RC0805JR-0710KL, Price=2, ValueSCH="10 кОм, 5%, 0,125 Вт"
R2_INPUTER1 R2_INPUTER2 R2_INPUTER3 R2_INPUTER4 R2_INPUTER5 R2_INPUTER6 R2_INPUTER7 R2_INPUTER8 R2_INPUTER9 R2_INPUTER10 R2_INPUTER11 R2_INPUTER12 R2_INPUTER13 R2_INPUTER14 R2_INPUTER15 R2_INPUTER16 R2_INPUTER17 R2_INPUTER18: library part RC0805JR-074K7L, "Бескорпусные толстопленочные резисторы", Manufacturer=Тайвань, MaxVoltage="150 В", Package=0805, Power=0,25, ChipDip=#https://www.chipdip.ru/product/0.125w-0805-4.7-kom-5#, ElementName="Чип резистор (SMD), 4.7 кОм, 5%, 0.125Вт 0805", ID=42, last_update=12.10.2023, Partnumber=RC0805JR-074K7L, Price=6*20, ValueSCH="4,7 кОм, 5%,  0.125Вт"
U1: library part Arduino_Nano, Manufacturer=Arduino, ElementName="Ардуино Нано", ID=12, Partnumber=Arduino_Nano, Price="~200 ₽", ValueSCH="Arduino Nano"
VD1_DRV1 VD1_DRV2 VD1_DRV3 VD1_DRV4 VD1_DRV5 VD1_DRV6 VD1_DRV7 VD1_DRV8 VD1_DRV9 VD1_DRV10 VD1_DRV11 VD1_DRV12 VD1_DRV13 VD1_DRV14 VD1_DRV15 VD1_DRV16 VD1_DRV17 VD1_DRV18: library part "UMW 1N4007 (A7)", Current=150mA, Manufacturer="UMW (Youtai Semiconductor Co., Ltd.)", MaxVoltage=1000, Package=SOD-123FL, Temperature=-55...+150°C, ValueSCH="1N4007 (A7)", Voltage=75V, VoltageDrop=1V, ChipDip=#https://www.chipdip.ru/product/1n4007-a7#, ElementName="Диод 1А 1000В, 1N4007 (A7)", HelpURL=https://www.digikey.com/product-detail/en/micro-commercial-co/1N4148WX-TP/1N4148WXTPMSCT-ND/717312, ID=2, last_update=12.10.2023, Partnumber="UMW 1N4007 (A7)", Price=2, RecoveryTime=4ns, TypeDiode="Single diode", ValueManufacturerPartNumber="Single diode, 75V, 150mA, 1V, 4ns, SOD-123FL, -55...+150°C"
VT1_DRV1 VT1_DRV2 VT1_DRV3 VT1_DRV4 VT1_DRV5 VT1_DRV6 VT1_DRV7 VT1_DRV8 VT1_DRV9 VT1_DRV10 VT1_DRV11 VT1_DRV12 VT1_DRV13 VT1_DRV14 VT1_DRV15 VT1_DRV16 VT1_DRV17 VT1_DRV18: library part 2N7002, "MOSFETS-транзистор", CurrentDS=7A, InputCapacitor=756pF, Manufacturer="Jiangsu Changjiang Electronics Technology Co., Ltd", MaxPower=2.5W, Package=8-TDSON, Temperature=-55...+150°C, VoltageDS=80V, ElementName="Транзистор, N-канал, 60В, 0.2А", GateCharge=9.1nC, HelpURL=https://www.digikey.com/product-detail/en/infineon-technologies/BSC340N08NS3GATMA1/BSC340N08NS3GATMA1TR-ND/2080655, ID=4, Partnumber=2N7002, Price=5, RDS=34mOhm, TypeTransistor="MOSFET N-channel transistor", URL_bying=https://www.chipdip.ru/product/2n7002-jcet, ValueManufacturerPartNumber="MOSFET N-channel transistor, 80V, 7A, 9.1nC, 2.5W, 34mOhm, 756pF, 8-TDSON, -55...+150°C", ValueSCH=2N7002, weight=0,05
X1 X1_DRV1 X1_DRV2 X1_DRV3 X1_DRV4 X1_DRV5 X1_DRV6 X1_DRV7 X1_DRV8 X1_DRV9 X1_DRV10 X1_DRV11 X1_DRV12 X1_DRV13 X1_DRV14 X1_DRV15 X1_DRV16 X1_DRV17 X1_DRV18 X1_INPUTER1 X1_INPUTER2 X1_INPUTER3 X1_INPUTER4 X1_INPUTER5 X1_INPUTER6 X1_INPUTER7 X1_INPUTER8 X1_INPUTER9 X1_INPUTER10 X1_INPUTER11 X1_INPUTER12 X1_INPUTER13 X1_INPUTER14 X1_INPUTER15 X1_INPUTER16 X1_INPUTER17 X1_INPUTER18 X2 X3: library part DG308-2.54-02P-14-00A(H), "Винтовой клеммный блок c рельефной обоймой, 2 контакта. Серия DG308-2.54", CurrentMax=10A, Manufacturer=Китай, ValueSCH="Клемник 308-021-14", VoltageMax=300VAC, ChipDip=#https://www.chipdip.ru/product/308-021-12-14#, ElementName="308-021-14, Клеммник винтовой, 2-контактный, 2.54мм, прямой", HelpURL=https://www.chipdip.ru/product/dg350-3.5-02p-12, ID=6, last_update=23.11.2020, Multichannel=2pin, Partnumber=DG308-2.54-02P-14-00A(H), Pitch=3.5mm, Price="19 ₽", TypeConnector="Terminal connector", ValueManufacturerPartNumber="Terminal connector, 2pin, 3.5mm, 300VAC, 10A"
  X1: CommentText="ПИТ 12В"
  X1_DRV1 X1_DRV2 X1_DRV3 X1_DRV4 X1_DRV5 X1_DRV6 X1_DRV7 X1_DRV8 X1_DRV9 X1_DRV10 X1_DRV11 X1_DRV12 X1_DRV13 X1_DRV14 X1_DRV15 X1_DRV16 X1_DRV17 X1_DRV18 X1_INPUTER1 X1_INPUTER2 X1_INPUTER3 X1_INPUTER4 X1_INPUTER5 X1_INPUTER6 X1_INPUTER7 X1_INPUTER8 X1_INPUTER9 X1_INPUTER10 X1_INPUTER11 X1_INPUTER12 X1_INPUTER13 X1_INPUTER14 X1_INPUTER15 X1_INPUTER16 X1_INPUTER17 X1_INPUTER18: CommentText="\"Разъем\""
  X2: CommentText="ПИТ 5В"
  X3: CommentText=RX_TX
X4: library part PLD-6, CurrentMax=3A, Manufacturer=Connfly, VoltageMax=500VAC, CommentText="\"Разъем\"", ElementName="Разъем 6 контактный (3 контакта в 2 ряда)", HelpURL=https://www.chipdip.ru/product/pld-6, ID=7, last_update=30.03.2021, Multichannel=6pin, Partnumber=PLD-6, Pitch=2.54mm, TypeConnector=Connector, ValueManufacturerPartNumber="Connector, 6pin, 2.54mm, 500VAC, 3A", ValueSCH=PLD-6

## Free pads (board coordinates)
  round 0 hole 2.8: ""(6,14.5) ""(6,65.5) ""(144,14.5) ""(144,65.5)

## Via types
v1: diameter 1.5, hole 0.6, Top Layer to Bottom Layer, 47 vias

## Nets (pads, with @x,y where several pads share a name; then routed paths per layer and width w, separated by ;. In a path a pad name is that pad's centre, name@x,y a point inside that pad or via, vN(x,y) a via of type N, cw(c..) or ccw(c..) an arc to the next point about the centre after c; other vN are vias at no path point)
+5: C2.1 D1.16 D2.1 D2.16 D3.2 D3.16 D4.3 D4.16 D5.1 D5.3 D5.16 D6.2 D6.3 D6.16 DA1.3 R2_INPUTER1.2 R2_INPUTER2.2 R2_INPUTER3.2 R2_INPUTER4.2 R2_INPUTER5.2 R2_INPUTER6.2 R2_INPUTER7.2 R2_INPUTER8.2 R2_INPUTER9.2 R2_INPUTER10.2 R2_INPUTER11.2 R2_INPUTER12.2 R2_INPUTER13.2 R2_INPUTER14.2 R2_INPUTER15.2 R2_INPUTER16.2 R2_INPUTER17.2 R2_INPUTER18.2 U1.27 X2.2 X4.2 | length 535.8
  Top Layer w1: v1(12.275,12.25) v1(19.325,12.25) v1(26.375,12.25) v1(33.425,12.25) v1(40.475,12.25) ; v1(109.1,35.45) 109.1,30.211 108.064,29.175 97.6,29.175 96.325,30.45 v1(96.325,33.375) 59.05,33.375 v1(45.45,46.975) 45.45,17.225 v1(40.475,12.25) ; v1(132.204,12.25) v1(124.975,12.25) v1(117.975,12.25) v1(110.975,12.25) v1(103.925,12.25) v1(96.875,12.25) v1(89.825,12.25) v1(82.775,12.25) v1(75.725,12.25) v1(68.779,12.25) v1(61.625,12.25) v1(54.575,12.25) v1(47.525,12.25) v1(40.475,12.25)
  Bottom Layer w0.5: D4.3@33,51.395 36.93,51.395 39.47,48.855 D4.16@42.5,48.855 45.47,48.855 46.4,47.925 ; D1.16@43.694,16.986 60.958,16.986 64.225,13.719 R2_INPUTER8.2@64.225,12.25 ; v1(75.725,12.25) 80.48,17.005 D2.1@90.525,17.005 ; D5.3@91.75,51.395 89.093,51.395 88.8,51.102 88.8,49.125 89.1,48.825 89.893,48.825 89.904,48.836 91.731,48.836 D5.1@91.75,48.855 D5.16@101.25,48.855 103.395,48.855 109.1,43.15 v1(109.1,35.45) ; D2.16@100.094,16.986 117.358,16.986 120.625,13.719 R2_INPUTER16.2@120.625,12.25 ; D3.2@125.05,18.275 129.175,18.275 132.111,15.339 ; v1(132.204,12.25) 132.204,15.246 132.111,15.339 ; D6.3@132.4,51.395 D6.2@132.4,50.125 130.268,50.125 129.975,49.832 129.975,48.05 130.65,47.375 138.725,47.375 140.205,48.855 D6.16@141.9,48.855 141.9,45.475 138.1,41.675 138.1,38.4 140.375,36.125 X2.2@143.425,36.125 ; D3.16@134.55,17.005 133.777,17.005 132.111,15.339
  Bottom Layer w1: v1(12.275,12.25) R2_INPUTER1.2@14.875,12.25 ; DA1.3@15.625,40.975 15.712,41.062 19.288,41.062 C2.1@19.375,41.15 19.375,44.15 22.2,46.975 v1(45.45,46.975) 46.4,47.925 64.159,47.925 64.744,47.339 64.744,44.836 U1.27@64.84,44.74 ; v1(19.325,12.25) R2_INPUTER2.2@21.925,12.25 ; v1(26.375,12.25) R2_INPUTER3.2@28.975,12.25 ; v1(33.425,12.25) R2_INPUTER4.2@36.025,12.25 ; v1(40.475,12.25) R2_INPUTER5.2@43.075,12.25 ; v1(47.525,12.25) R2_INPUTER6.2@50.125,12.25 ; v1(54.575,12.25) R2_INPUTER7.2@57.175,12.25 ; v1(61.625,12.25) R2_INPUTER8.2@64.225,12.25 ; v1(68.779,12.25) R2_INPUTER9.2@71.275,12.25 ; v1(75.725,12.25) R2_INPUTER10.2@78.325,12.25 ; v1(82.775,12.25) R2_INPUTER11.2@85.375,12.25 ; v1(89.825,12.25) R2_INPUTER12.2@92.425,12.25 ; v1(96.325,33.375) 101.125,33.375 X4.2@101.21,33.46 ; v1(96.875,12.25) R2_INPUTER13.2@99.475,12.25 ; v1(103.925,12.25) R2_INPUTER14.2@106.525,12.25 ; v1(110.975,12.25) R2_INPUTER15.2@113.575,12.25 ; v1(117.975,12.25) R2_INPUTER16.2@120.575,12.25 ; v1(124.975,12.25) R2_INPUTER17.2@127.575,12.25 ; v1(132.204,12.25) R2_INPUTER18.2@134.575,12.25 134.575,14.225 143.425,23.075 X2.2@143.425,36.125